# Altium PCB Quad-Serial.PcbDoc
Units mm, origin at the board's own origin, x right, y up, seen from the top; angles counter-clockwise.
Board outline 78 x 100 mm, 2 copper layers (Top Layer, Bottom Layer); 91 components, 67 nets, 340 pads, 202 vias.
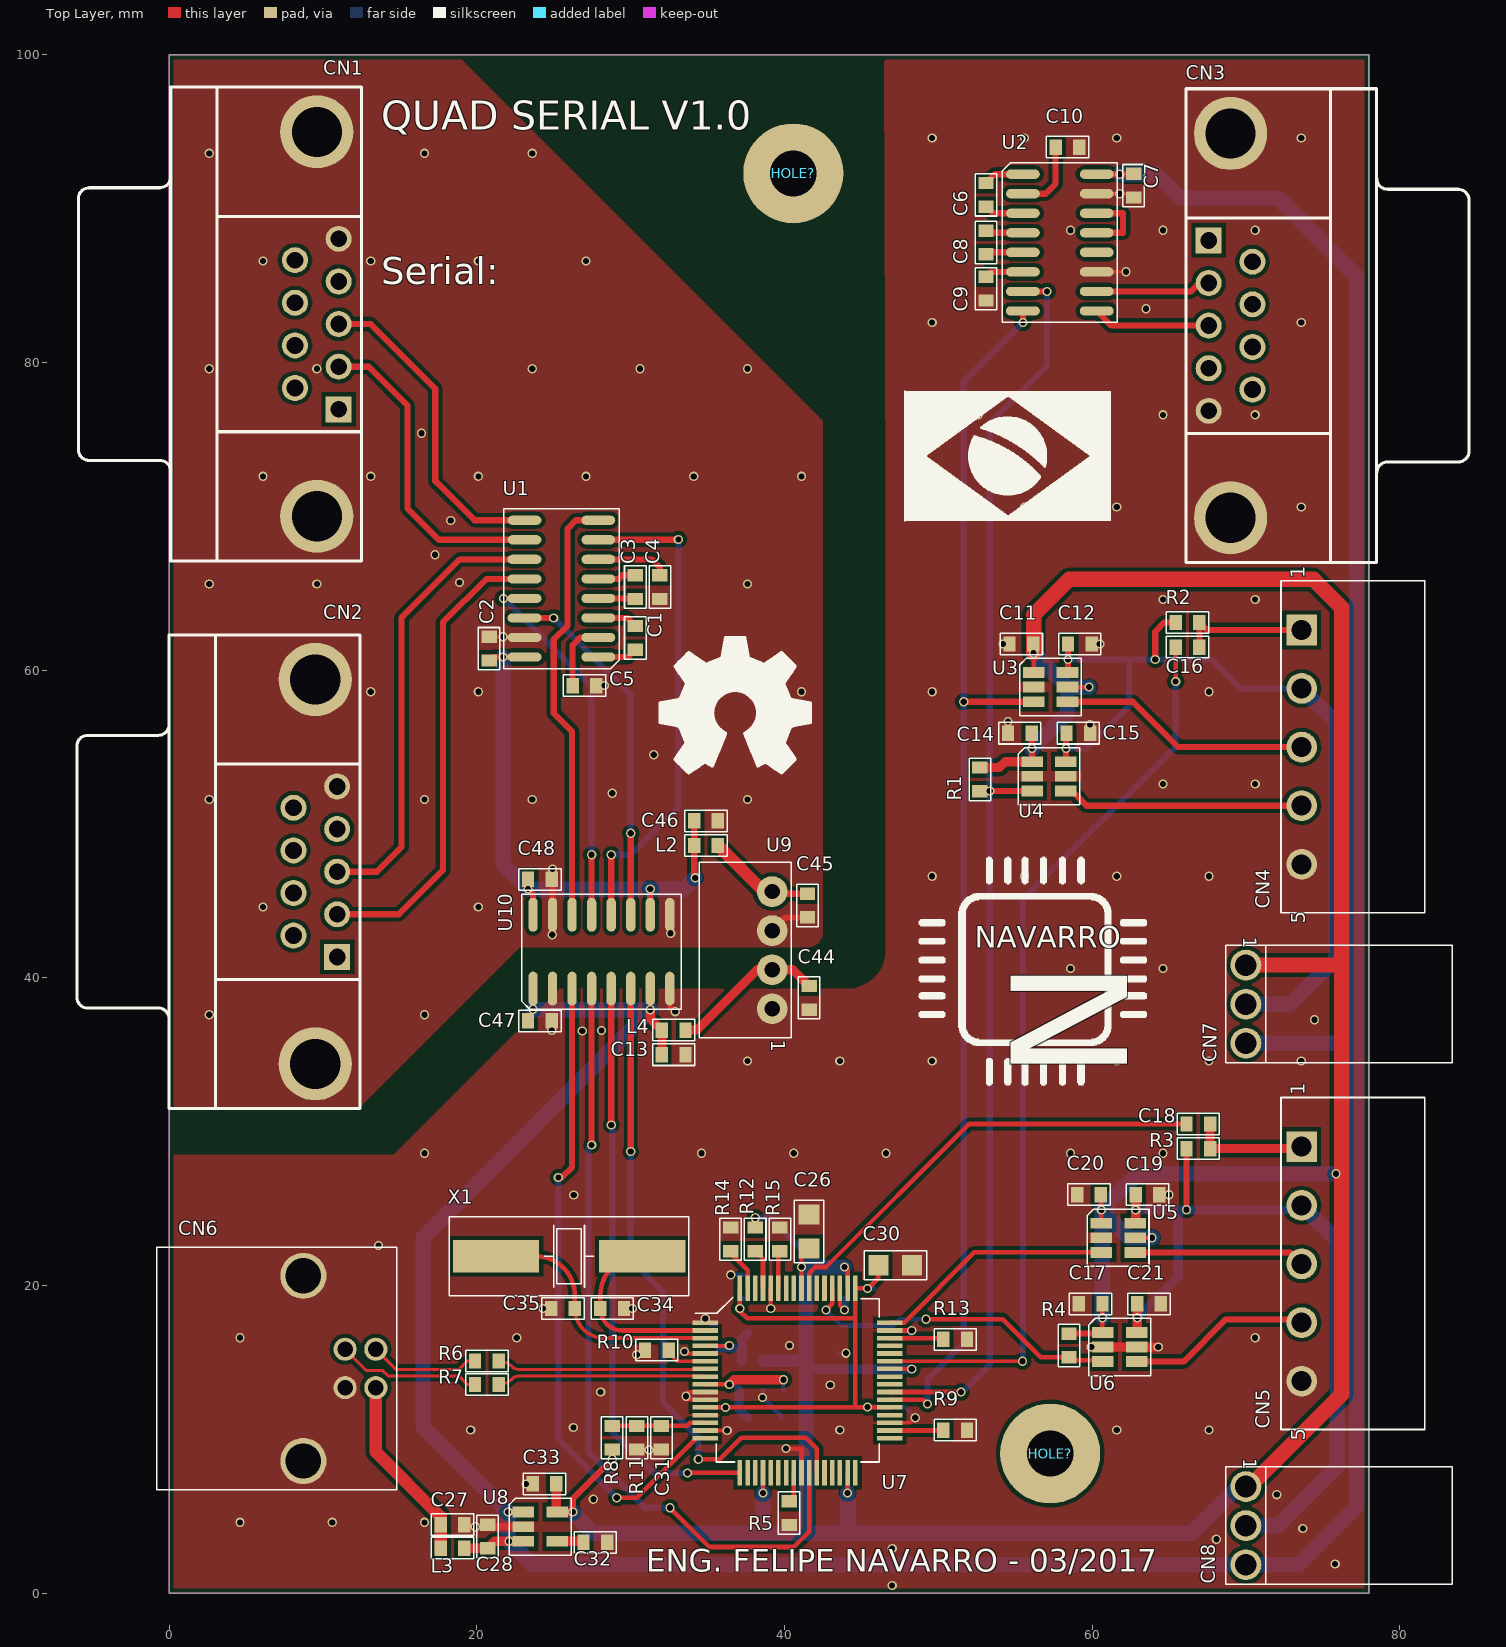
[diagram p0: Top Layer view]
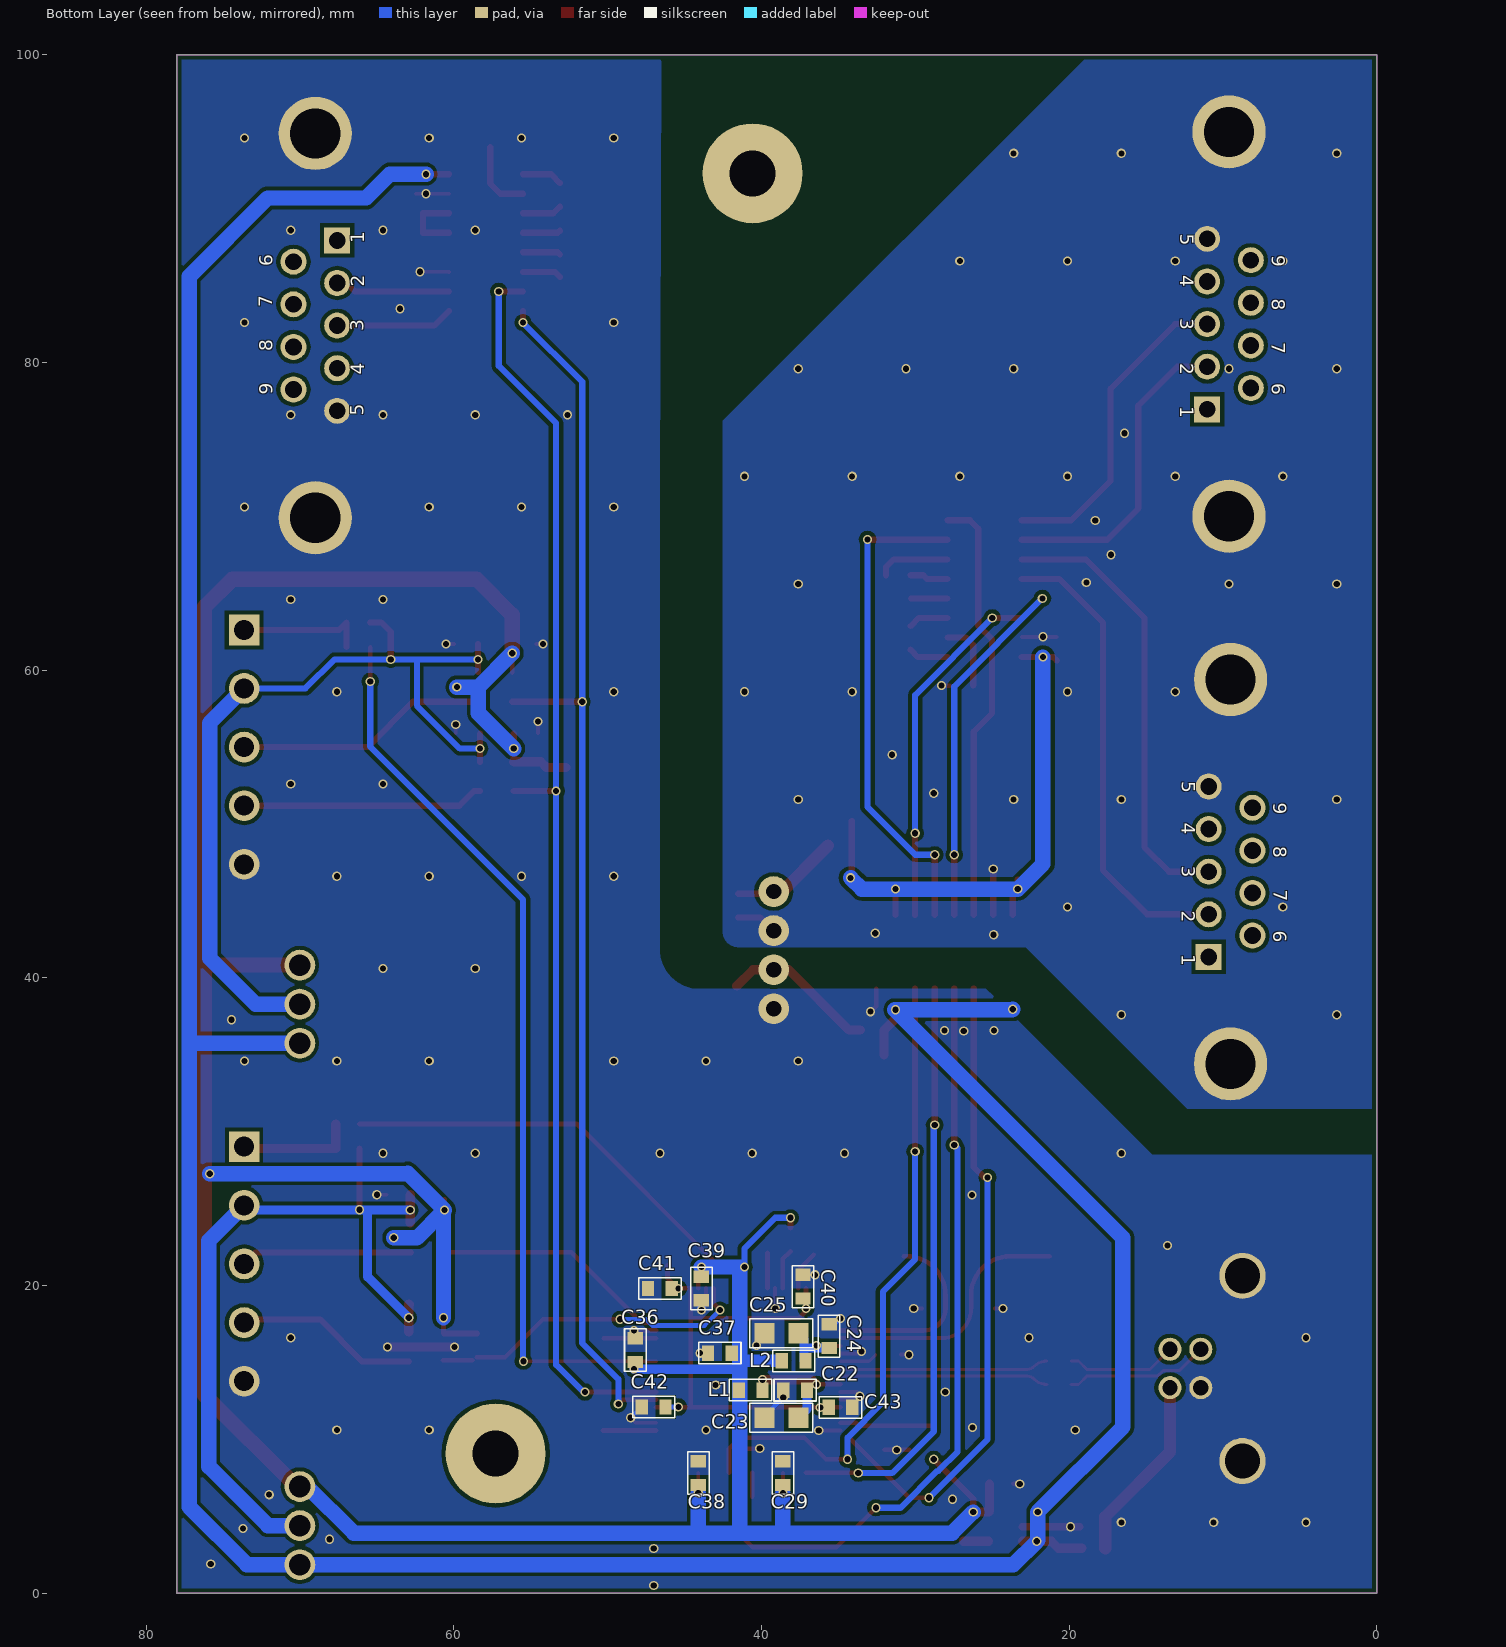
[diagram p1: Bottom Layer view, seen from below]

## Layer stack, top to bottom
Top Solder: solder mask 0.0102, Solder Resist, Dk 3.5
Top Layer: signal copper 0.0356
Dielectric 1: dielectric 0.32, FR-4, Dk 4.8
Bottom Layer: signal copper 0.0356
Bottom Solder: solder mask 0.0102, Solder Resist, Dk 3.5

## Board outline
0,0 78,0 78,100 0,100

## Design rules (kind name [scope] priority, off if disabled: settings)
Clearance [All] p1: gap=0.254
DiffPairsRouting [All] p1: maxlimit=0.254 minlimit=0.2 mostfreqgap=0.2 toplayer_minwidth=0.2 toplayer_maxwidth=0.381 toplayer_prefwidth=0.381 bottomlayer_minwidth=0.2 bottomlayer_maxwidth=0.381 bottomlayer_prefwidth=0.381 maxuncoupledlength=12.7
PolygonConnect [All] p1: connectstyle=Direct reliefconductorwidth=0.254 reliefentries=4 polygonreliefangle="90 Angle" airgapwidth=0.254
RoutingVias [All] p1: holewidth=0.711 width=1.27 viastyle="Through Hole" minholewidth=0.711 minwidth=1.27 maxholewidth=0.711 maxwidth=1.27
SolderMaskExpansion [All] p1: expansion=0.102
Width [All] p1: maxlimit=3 minlimit=0.254 preferedwidth=0.254
29 further rules are at their usual default settings.

## Classes and differential pairs
component class Quad-RS232-1.0-Blocos: HOLE?
component class USB: C22 C23 C24 C25 C26 C27 C28 C29 C30 C31 C32 C33 C34 C35 C36 C37 C38 C39 C40 C41 C42 C43 CN6 L1 L2 L3 R5 R6 R7 R8 R9 R10 R11 R12 R13 R14 R15 U7 U8 X1
component class TTL: C11 C12 C14 C15 C16 C17 C18 C19 C20 C21 CN4 CN5 CN7 CN8 CN#1 CN#2 R1 R2 R3 R4 U3 U4 U5 U6
component class RS-232: C1 C2 C3 C4 C5 C6 C7 C8 C9 C10 C13 C44 C45 C46 C47 C48 CN1 CN2 CN3 L2 L4 U1 U2 U9 U10
differential pair DI: +DI_P -DI_N
differential pair D: +D_P -D_N

## Components (designator, comment, footprint, x,y, rotation, side; value= is the part's Value field where it differs from the comment)
C1 "Capacitor Cerâmico" CC0603 30.3,62.1 r270 top
C2 "Capacitor Cerâmico" CC0603 20.8,61.4 r270 top
C3 "Capacitor Cerâmico" CC0603 30.3,65.4 r270 top
C4 "Capacitor Cerâmico" CC0603 31.9,65.4 r90 top
C5 "Capacitor Cerâmico" CC0603 27,59 r180 top
C6 "Capacitor Cerâmico" CC0603 53.1,90.9 r90 top
C7 "Capacitor Cerâmico" CC0603 62.7,91.5 r90 top
C8 "Capacitor Cerâmico" CC0603 53.1,87.8 r90 top
C9 "Capacitor Cerâmico" CC0603 53.1,84.8 r90 top
C10 "Capacitor Cerâmico" CC0603 58.4,94 r180 top
C11 "Capacitor Cerâmico" CC0603 55.4,61.7 r0 top
C12 "Capacitor Cerâmico" CC0603 59.2,61.7 r180 top
C13 "Capacitor Cerâmico" CC0603 32.8,35 r180 top
C14 "Capacitor Cerâmico" CC0603 55.3,55.9 r0 top
C15 "Capacitor Cerâmico" CC0603 59.1,55.9 r180 top
C16 "Capacitor Cerâmico" CC0603 66.2,61.5 r0 top
C17 "Capacitor Cerâmico" CC0603 59.9,18.8 r0 top
C18 "Capacitor Cerâmico" CC0603 66.9,30.5 r0 top
C19 "Capacitor Cerâmico" CC0603 63.6,25.9 r180 top
C20 "Capacitor Cerâmico" CC0603 59.8,25.9 r0 top
C21 "Capacitor Cerâmico" CC0603 63.7,18.8 r180 top
C22 "Capacitor Cerâmico" CC0603 37.806,13.189 r180 bottom
C23 "Capacitor Cerâmico" CC0805 38.7,11.4 r180 bottom
C24 "Capacitor Cerâmico" CC0603 35.6,16.7 r270 bottom
C25 "Capacitor Cerâmico" CC0805 38.7,16.9 r180 bottom
C26 "Capacitor Cerâmico" CC0805 41.6,23.5 r270 top
C27 "Capacitor Cerâmico" CC0603 18.415,4.445 r180 top
C28 "Capacitor Cerâmico" CC0603 20.701,3.683 r270 top
C29 "Capacitor Cerâmico" CC0603 38.6,7.8 r270 bottom
C30 "Capacitor Cerâmico" CC0805 47.204,21.317 r180 top
C31 "Capacitor Cerâmico" CC0603 32,10.1 r90 top
C32 "Capacitor Cerâmico" CC0603 27.7,3.3 r180 top
C33 "Capacitor Cerâmico" CC0603 24.4,7.1 r0 top
C34 "Capacitor Cerâmico" CC0603 28.8,18.5 r180 top
C35 "Capacitor Cerâmico" CC0603 25.6,18.5 r0 top
C36 "Capacitor Cerâmico" CC0603 48.2,15.8 r270 bottom
C37 "Capacitor Cerâmico" CC0603 42.7,15.6 r180 bottom
C38 "Capacitor Cerâmico" CC0603 44.1,7.8 r270 bottom
C39 "Capacitor Cerâmico" CC0603 43.9,19.8 r90 bottom
C40 "Capacitor Cerâmico" CC0603 37.298,19.92 r270 bottom
C41 "Capacitor Cerâmico" CC0603 46.6,19.8 r180 bottom
C42 "Capacitor Cerâmico" CC0603 47,12.1 r180 bottom
C43 "Capacitor Cerâmico" CC0603 34.854,12.074 r0 bottom
C44 "Capacitor Cerâmico" CC0603 41.6,38.7 r90 top
C45 "Capacitor Cerâmico" CC0603 41.5,44.7 r90 top
C46 "Capacitor Cerâmico" CC0603 34.9,50.2 r180 top
C47 "Capacitor Cerâmico" CC0603 24.1,37.2 r180 top
C48 "Capacitor Cerâmico" CC0603 24.1,46.4 r180 top
CN1 "DB-9" "CONN DB9-F/H" 9.6,82.5 r90 top
CN2 "DB-9" "CONN DB9-F/H" 9.5,46.9 r90 top
CN3 "DB-9" "CONN DB9-F/H" 69,82.4 r270 top
CN4 "Block" "CONN BLOCK5 RCPT/H 3.81" 73.625,55 r0 top
CN5 "Block" "CONN BLOCK5 RCPT/H 3.81" 73.625,21.4 r0 top
CN6 "USB B" CONN_USB-B_RCPT-H 6.3,14.605 r270 top
CN7 "Conector KK" "CONN HDR3-POL P.100 - H" 70,38.3 r270 top
CN8 "Conector KK" "CONN HDR3-POL P.100 - H" 70,4.4 r270 top
CN#1 "Conector Externo" N/A 127.909,51.274 r90 top
CN#2 "Conector Externo" N/A 122.428,58.674 r90 top
HOLE? "Furo de Fixação" Furo_M3 57.275,9.075 r0 top
HOLE? "Furo de Fixação" Furo_M3 40.575,92.3 r0 top
L1 "Bead" CC0603 40.7,13.2 r180 bottom
L2 "Bead" CC0603 34.9,48.6 r180 top
L2 "Bead" CC0603 37.9,15.1 r180 bottom
L3 "Bead" CC0603 18.415,2.921 r0 top
L4 "Bead" CC0603 32.8,36.6 r0 top
R1 "Resistor" CC0603 52.7,52.9 r90 top
R2 "Resistor" CC0603 66.2,63.1 r180 top
R3 "Resistor" CC0603 66.9,28.9 r180 top
R4 "Resistor" CC0603 58.5,16.1 r90 top
R5 "Resistor" CC0603 40.3,5.2 r270 top
R6 "Resistor" CC0603 20.656,15.088 r0 top
R7 "Resistor" CC0603 20.656,13.564 r0 top
R8 "Resistor" CC0603 28.8,10.1 r90 top
R9 "Resistor" CC0603 51.1,10.6 r0 top
R10 "Resistor" CC0603 31.7,15.8 r0 top
R11 "Resistor" CC0603 30.4,10.1 r90 top
R12 "Resistor" CC0603 38.1,23 r270 top
R13 "Resistor" CC0603 51.1,16.5 r0 top
R14 "Resistor" CC0603 36.5,23 r270 top
R15 "Resistor" CC0603 39.7,23 r90 top
U1 "MAX3232" SOIC-16N 25.5,65.3 r180 top
U2 "MAX3232" SOIC-16N 57.9,87.8 r0 top
U3 "SN74LVC1T45" SOT-23-6N 57.3,58.9 r0 top
U4 "SN74LVC1T45" SOT-23-6N 57.2,53.1 r0 top
U5 "SN74LVC1T45" SOT-23-6N 61.7,23.1 r0 top
U6 "SN74LVC1T45" SOT-23-6N 61.8,16 r0 top
U7 "FT4232H" TQFP-64N 40.854,13.824 r0 top
U8 "TPS79333DBVR" SOT-23-5N 24.13,4.318 r0 top
U9 "PDS1-S5-S5-S" SIP-4N 39.2,41.8 r270 top
U10 "SI8642BC-B-IS1" SOIC-16N 28.1,41.7 r90 top
X1 "12MHz" HC/49US 26,21.9 r180 top

## Footprints (in the part's own frame and the unit in brackets; to place one, negate y for a bottom-side part, rotate by r counter-clockwise, add the part's x,y. Pads: shape width x height; smd on the part's side, far side on the other; paste and mask are expansions set on the pad)
CC0603 [mm] "Chip Resistor, 2-Leads, Body 1,6x0,8mm, IPC Medium Density"
  rect 0.8x1 smd: 1(-0.77,0) 2(0.77,0)
  silkscreen extent -1.38,-0.7 1.38,0.7, body extent -0.8,-0.42 0.8,0.43, height 0.45
CC0805 [mm] "Chip Resistor, 2-Leads, Body 2,0x1,2mm, IPC Medium Density"
  rect 1.3x1.35 smd: 1(-1.1,0) 2(1.1,0)
  silkscreen extent -2.05,-0.95 2.02,0.95, body extent -1,-0.63 1,0.62, height 0.6
"CONN BLOCK5 RCPT/H 3.81" [mm] "Conector Shrouded Block. Macho, 4 Pin, Horizontal"
  rect 2x2 hole 1.3: 1(0,7.62)
  round 2 hole 1.3: 2(0,3.81) 3(0,0) 4(0,-3.81) 5(0,-7.62)
  silkscreen extent -1.35,-10.76 8,10.82, body extent -1.2,-10.66 17.14,10.68, height 7.95
"CONN DB9-F/H" [mm] "Connector; Male; D Subminiature; 9 Position; Right Angle; Pitch 1.385 mm"
  rect 1.69x1.69 hole 1.09: 1(-5.54,-1.42)
  round 1.69 hole 1.09: 2(-2.77,-1.42) 3(0,-1.42) 4(2.77,-1.42) 5(5.54,-1.42) 6(-4.155,1.42) 7(-1.385,1.42) 8(1.385,1.42) 9(4.155,1.42)
  round 4.76 hole 3.26: 10(-12.495,0) 11(12.495,0)
  silkscreen extent -15.4,-2.9 15.4,15.5, body extent -15.39,-2.9 15.41,15.49, height 12.75
"CONN HDR3-POL P.100 - H" [mm] "Conector KK Macho, Pitch 2.54mm, 3 Polos 90º"
  round 2 hole 1.4: 1(-2.53,0) 2(0.01,0) 3(2.55,0)
  silkscreen extent -3.82,-1.3 3.82,13.4, body extent -3.83,-0.62 3.82,13.4, height 6
CONN_USB-B_RCPT-H [mm] "Conector USB SMD tipo B, Macho"
  round 1.5 hole 1: 1(1.25,7.135) 2(-1.25,7.135) 3(-1.25,5.135) 4(1.25,5.135)
  round 3 hole 2.3: 5(6.02,2.425) 6(-6.02,2.425)
  silkscreen extent -7.87,-7.11 7.87,8.49, body extent -7.45,-7.96 7.35,8.54, height 11
Furo_M3 [mm] "Furo metalizado para parafuso M3"
  round 6.5 hole 3 paste+0: X(0,0)
  body extent -2.8,-2.8 2.8,2.8, height 2.38
HC/49US [mm] "Crystal, 2-Leads, Body 11,5x4,7mm, IPC Low Density"
  rect 5.6x2.1 smd: 1(-4.75,0) 2(4.75,0)
  silkscreen extent -7.77,-2.58 7.78,2.58, body extent -6.15,-2.25 6.15,2.25, height 5.18
N/A [mm]
SIP-4N [mm] "Conversosr DC-DC, SIP, 4 Pin"
  round 2 hole 1: 1(3.81,0) 2(1.27,0) 3(-1.27,0) 4(-3.81,0)
  silkscreen extent -5.71,-4.75 5.71,1.25, body extent -5.85,-4.78 5.85,1.33, height 10.21
SOIC-16N [mm] "SOIC, 16-Leads, Body 9,9x3,9mm (max), Pitch 1,27mm, IPC Medium Density"
  oval 2.2x0.6 smd: 1(-2.4,4.445) 2(-2.4,3.175) 3(-2.4,1.905) 4(-2.4,0.635) 5(-2.4,-0.635) 6(-2.4,-1.905) 7(-2.4,-3.175) 8(-2.4,-4.445) 9(2.4,-4.445) 10(2.4,-3.175) 11(2.4,-1.905) 12(2.4,-0.635) 13(2.4,0.635) 14(2.4,1.905) 15(2.4,3.175) 16(2.4,4.445)
  silkscreen extent -3.74,-5.19 3.74,5.19, body extent -3.04,-5 3.04,5, height 1.65
SOT-23-5N [mm] "SOT23, 5-Leads, Body 3,1x2,7mm (max), Pitch 0,95mm, IPC Medium Density"
  rect 1.4x0.7 smd: 1(-1.1,0.95) 2(-1.1,0) 3(-1.1,-0.95) 4(1.1,-0.95) 5(1.1,0.95)
  silkscreen extent -2.01,-1.86 2,1.86, body extent -1.4,-1.45 1.4,1.45, height 1.09
SOT-23-6N [mm] "SOT23, 6-Leads, Body 3,1x2,7mm (max), Pitch 0,95mm, IPC Medium Density"
  rect 1.4x0.7 smd: 1(-1.1,0.95) 2(-1.1,0) 3(-1.1,-0.95) 4(1.1,-0.95) 5(1.1,0) 6(1.1,0.95)
  silkscreen extent -2.01,-1.86 2,1.86, body extent -1.5,-1.5 1.5,1.5, height 1.4
TQFP-64N [mm] "TQFP, 64-Leads, Body 12,0x12,0mm (max), Pitch 0,50mm, IPC Medium Density"
  rect 1.65x0.3 smd: 1(-6,3.75) 2(-6,3.25) 3(-6,2.75) 4(-6,2.25) 5(-6,1.75) 6(-6,1.25) 7(-6,0.75) 8(-6,0.25) 9(-6,-0.25) 10(-6,-0.75) 11(-6,-1.25) 12(-6,-1.75) 13(-6,-2.25) 14(-6,-2.75) 15(-6,-3.25) 16(-6,-3.75) 33(6,-3.75) 34(6,-3.25) 35(6,-2.75) 36(6,-2.25) 37(6,-1.75) 38(6,-1.25) 39(6,-0.75) 40(6,-0.25) 41(6,0.25) 42(6,0.75) 43(6,1.25) 44(6,1.75) 45(6,2.25) 46(6,2.75) 47(6,3.25) 48(6,3.75)
  rect 0.3x1.65 smd: 17(-3.75,-6) 18(-3.25,-6) 19(-2.75,-6) 20(-2.25,-6) 21(-1.75,-6) 22(-1.25,-6) 23(-0.75,-6) 24(-0.25,-6) 25(0.25,-6) 26(0.75,-6) 27(1.25,-6) 28(1.75,-6) 29(2.25,-6) 30(2.75,-6) 31(3.25,-6) 32(3.75,-6) 49(3.75,6) 50(3.25,6) 51(2.75,6) 52(2.25,6) 53(1.75,6) 54(1.25,6) 55(0.75,6) 56(0.25,6) 57(-0.25,6) 58(-0.75,6) 59(-1.25,6) 60(-1.75,6) 61(-2.25,6) 62(-2.75,6) 63(-3.25,6) 64(-3.75,6)
  silkscreen extent -6.65,-5.3 5.3,5.41, body extent -6,-6 6,6, height 1.2

## Part data
C1 C3 C4 C5 C6 C8 C9 C10: library part "Cap 1uF 50V 0603 X5R", "Capacitor (Semiconductor SIM Model)"
C2 C7 C11 C12 C13 C14 C15 C16 C17 C18 C19 C20 C21 C22 C24 C27 C28 C29 C31 C33 C36 C37 C38 C39 C40 C41 C42 C43 C44 C45 C46 C47 C48: library part "Cap 100nF 50V 0603 X7R", "Capacitor (Semiconductor SIM Model)"
C23 C25 C26 C30: library part "Cap 10uF 25V 0805 X5R", "Capacitor (Semiconductor SIM Model)"
C32: library part "Cap 10nF 50V 0603 X7R 5%", "Capacitor (Semiconductor SIM Model)"
C34 C35: library part "Cap 36pF 50V 0603 NP0", "Capacitor (Semiconductor SIM Model)"
CN1 CN2 CN3: library part "DB-9 Femea", "Receptacle Assembly, 9 Position, Right Angle"
CN4 CN5: library part "SHRD Block 5P RCPT-H P3.81mm", "Conector Shrouded Block"
CN6: library part "USB B RCPT-H", "Conector Jack USB B, Through Hole, Right Angle, Horizontal"
CN7 CN8: library part "KK 3P Macho-H P2.54mm"
CN#1 CN#2: library part "Plug Block 5P 3.81mm", "Conector Plug"
HOLE? HOLE?: library part Parafuso, "Furo para parafuso"
L1 L2 L2 L3 L4: library part "Bd 100R@100MHz 0603 2A"
R1 R4: library part "Res 47K 1% 0603 1/10W"
R2 R3 R5 R8 R9 R11 R12 R13 R14 R15: library part "Res 10K 1% 0603 1/10W"
R6 R7: library part "Res 22R 1% 0603 1/10W"
R10: library part "Res 12K 1% 0603 1/10W"
U1 U2: "3.0V TO 5.5V, Low-Power, up to 1Mbps, True RS-232 Transceiver Using Four 0.1µF External Capacitor"
U3 U4 U5 U6: "SINGLE-BIT DUAL-SUPPLY BUS TRANSCEIVER  WITH CONFIGURABLE VOLTAGE TRANSLATION AND 3-STATE OUTPUTS"
U7: library part FT2232H, "FT2232H DUAL HIGH SPEED USB TO MULTIPURPOSE UART/FIFO IC"
U8: library part TPS79333, "ULTRALOW-NOISE, HIGH PSRR, FAST RF 200mA LOW-DROPOUT LINEAR  REGULATORS I"
U9: library part "Fonte PDS1-S5-S5-S", "Fonte chaveada isolada"
U10: library part SI8642, "LOW-POWER QUAD-CHANNEL DIGITAL ISOLATOR"
X1: library part XTAL, "Crystal Oscillator"

## Via types
v1: diameter 0.6, hole 0.4, Top Layer to Bottom Layer, tented both sides, 201 vias
v2: diameter 0.6/0.6 (per signal layer), hole 0.4, Top Layer to Bottom Layer, tented both sides, 1 vias

## Nets (pads, with @x,y where several pads share a name; then routed paths per layer and width w, separated by ;. In a path a pad name is that pad's centre, name@x,y a point inside that pad or via, vN(x,y) a via of type N, cw(c..) or ccw(c..) an arc to the next point about the centre after c; other vN are vias at no path point)
1V8: C30.2 C40.2 C41.2 C42.2 C43.2 U7.12 U7.37 U7.49 U7.64 | length 34.1
  Top Layer w0.254: 44.537,12.074 44.604,12.141
  Top Layer w0.3: U7.12 44.537,12.074 U7.37 ; U7.64 37.104,18.336 37.571,17.869 44.585,17.869 44.604,17.888 ; 44.604,12.141 44.604,17.888 ; C30.2 46.104,20.471 45.457,19.824 U7.49 44.604,17.888
  Bottom Layer w0.3: C43.2 v1(36.174,12.074) ; v1(37.1,18.5) 37.1,18.952 C40.2 ; v1(45.4,12.1) C42.2 ; v1(45.4,19.8) C41.2
3V3: C11.2 C14.2 C17.2 C20.2 C26.2 C29.2 C33.2 C36.2 C37.2 C38.2 C39.2 CN7.1 CN8.1 L1.1 L2.1@38.67,15.1 R1.2 R4.2 R8.1 R12.1 U3.1 U3.5 U4.1 U5.1 U5.5 U6.1 U7.20 U7.31 U7.42 U7.50 U7.56 U8.5 | length 241.7
  Top Layer w0.254: v1(38.604,6.504) U7.20 ; U7.56 v1(41.104,21.196) C26.2@41.104,22.096 ; v1(44.104,6.504) U7.31 ; U7.42 v1(48.274,14.574)
  Top Layer w0.3: v1(43.9,21.2) 44.104,20.996 U7.50 ; U3.1 v1(56.2,61.1) ; U3.5 v1(59.8,58.9) ; U5.1 v1(60.6,24.9) C20.2@60.6,25.6 ; U6.1@60.67,16.98 v1(60.67,17.9) C17.2 ; U5.5 v1(63.9,23.1)
  Top Layer w0.4: v1(26.232,5.268) 26.232,6.132 v1(28.8,8.7) ; R12.1 v1(38.1,24.4) ; U4.1 v1(56.1,54.9) C14.2@56.1,55.87 ; R4.2 U6.1@60.62,16.87
  Top Layer w0.6: U8.5@25.17,5.328 C33.2 ; U8.5 v1(26.232,5.268) ; R1.2 53.97,53.67 54.35,54.05 U4.1
  Top Layer w1: v1(56.2,61.1) 56.2,63.6 58.5,65.9 74.4,65.9 76.225,64.075 76.225,40.83 ; CN8.1 70.23,6.93 76.225,12.925 76.225,40.83 ; CN7.1 76.225,40.83
  Bottom Layer w0.4: v1(38.1,24.4) 39.1,24.4 41.104,22.396 v1(41.104,21.196)
  Bottom Layer w0.6: 41.646,14.546 48.274,14.546 v1(48.274,14.574)
  Bottom Layer w0.8: L2.1@38.67,15.1 40.9,15.1
  Bottom Layer w1: v1(26.232,5.268) 27.6,3.9 41.4,3.9 ; 38.604,4.004 v1(38.604,6.504) ; v1@41.4,21.196 41.4,3.9 ; v1@41.4,21.2 v1(43.9,21.2) ; 44.104,3.904 v1(44.104,6.504) ; v1(56.1,54.9) 58.4,57.2 58.4,58.9 ; v1(56.2,61.1) 58.4,58.9 ; v1(59.8,58.9) 58.4,58.9 ; v1(60.67,17.9) v1@60.67,24.83 ; v1(63.9,23.1) 62.4,23.1 v1@60.67,24.83 ; CN8.1 69.53,6.93 66.5,3.9 41.4,3.9 ; v1(75.859,27.266) 63.034,27.266 63,27.3 v1(60.6,24.9) v1@60.67,24.83
5V: C7.2 C13.2 C28.2 C47.2 CN7.3 CN8.3 L3.2 L4.1 U2.16 U8.1 U8.3 U10.1 U10.7 | length 222.9
  Top Layer w0.4: U2.16 v1(61.8,92.245) C7.2@62.675,92.245
  Top Layer w0.6: L3.2@19.169,2.921 19.177,2.913 20.693,2.913 21.148,3.368 U8.3 ; v1(31.275,37.925) 31.275,37.355 L4.1 C13.2
  Bottom Layer w1: v1(23.655,37.955) 23.685,37.925 v1@31.325,37.925 ; v1@31.3,37.9 16.5,23.1 16.5,10.805 v1(22.037,5.268) 22.037,3.429 v1(22.098,3.368) 23.62,1.846 69.996,1.846 CN8.3 73.45,1.85 77.196,5.596 77.196,85.604 72.1,90.7 65.7,90.7 64.155,92.245 v1(61.8,92.245) ; CN7.3 77.175,35.75
5V_ISO: C2.2 C46.2 C48.2 L2.2@34.13,48.6 U1.16 U10.10 U10.16 | length 37
  Top Layer w0.4: C2.2 21.025,60.855 v1(21.7,60.855) U1.16 ; C48.2 v1(23.33,45.77) 23.655,45.445 U10.16 ; U10.10 v1(31.275,45.775) ; v1@34.13,46.6 C46.2
  Bottom Layer w1: v1(21.7,60.855) 21.7,47.4 v1(23.33,45.77) 33.47,45.77 v1(34.2,46.5)
232-RX1: CN1.2 U1.10 | length 20.7
  Top Layer w0.4: CN1.2 12.97,79.73 15.5,77.2 15.5,70.5 17.525,68.475 U1.10
232-RX2: CN2.2 U1.12 | length 30.6
  Top Layer w0.4: CN2.2 14.93,44.13 17.8,47 17.8,63.1 20.635,65.935 U1.12
232-RX3: CN3.2 U2.10 | length 6.9
  Top Layer w0.4: U2.10 66.435,84.625 CN3.2@66.98,85.17
232-TX1: CN1.3 U1.9 | length 20.9
  Top Layer w0.4: CN1.3 13.1,82.5 17.3,78.3 17.3,72.3 19.855,69.745 U1.9
232-TX2: CN2.3 U1.11 | length 29.3
  Top Layer w0.4: CN2.3 13.5,46.9 15.1,48.5 15.1,63.4 18.905,67.205 U1.11
232-TX3: CN3.3 U2.9 | length 7.1
  Top Layer w0.4: U2.9 61.255,82.4 CN3.3@66.98,82.4
D_N: R6.2 U7.7 | length 13.6
  Top Layer w0.2: R6.2 cw(c21.426,13.881) 22.28,14.734 ccw(c22.783,15.238) 22.783,14.526 U7.7@34.854,14.526
D_P: R7.2 U7.8 | length 13.6
  Top Layer w0.2: R7.2 ccw(c21.426,14.771) 22.28,13.918 cw(c22.783,13.414) 22.783,14.126 U7.8@34.854,14.126
DI_N: CN6.2 R6.1 | length 7.2
  Top Layer w0.2: CN6.2 14.764,14.526 18.824,14.526 19.386,15.088 R6.1
DI_P: CN6.3 R7.1 | length 9.4
  Top Layer w0.2: CN6.3 12.831,14.459 13.892,14.459 14.225,14.126 18.824,14.126 19.386,13.564 R7.1
GND: C7.1 C9.1 C10.1 C11.1 C12.1 C13.1 C14.1 C15.1 C17.1 C19.1 C20.1 C21.1 C22.1 C23.1 C24.1 C25.1 C26.1 C27.1 C28.1 C29.1 C30.1 C31.1 C32.1 C33.1 C34.1 C35.1 C36.1 C37.1 C38.1 C39.1 C40.1 C41.1 C42.1 C43.1 C44.1 C47.1 CN3.5 CN3.10 CN3.11 CN4.5 CN5.5 CN6.4 CN6.5 CN6.6 R5.2 R9.2 R10.1 R11.1 R13.2 R14.1 R15.2 U2.11 U2.15 U3.2 U4.2 U4.5 U5.2 U6.2 U6.5 U7.1 U7.5 U7.10 U7.11 U7.13 U7.15 U7.25 U7.35 U7.47 U7.51 U7.60 U8.2 U9.1 U10.2 U10.8 | length 41
  Top Layer w0.254: v1(24.3,18.5) C35.1 ; C34.1 v1(30.1,18.5) ; v1(30.4,15.5) R10.1@30.93,15.5 ; v1@33.626,15.574 U7.5 ; U7.15 v1(36.274,10.574) ; U7.11 33.726,12.574 33.6,12.7 33.6,12.9 33.774,13.074 U7.10 ; v1(39.104,18.496) U7.60 ; U7.51 43.604,18.696 v1(43.9,18.4) ; U7.35 48.174,11.074 v1(48.5,11.4) ; v1(54.2,61.7) C11.1 ; C14.1 v1(54.53,56.67) ; C15.1 v1(59.87,56.47) ; C12.1 v1(60.5,61.7) ; U2.11 60.305,85.9 v1(62.2,85.9) ; U2.15 C7.1@62.455,90.975 ; C19.1 v1(65,25.9)
  Top Layer w0.3: v1(23.2,7.1) C33.1 ; R11.1 C31.1 ; U10.8 32.545,38.155 v1(32.9,37.8) ; v1(40.104,9.396) 41.104,9.396 U7.25 ; U7.47 v1(48.274,17.074)
  Top Layer w0.5: C27.1@19.312,4.318 U8.2
  Top Layer w0.6: v1(59.946,16) U6.2 U6.5 v1(64.3,16)
  Bottom Layer w0.254: v1(34.854,17.846) 35.23,17.47 C24.1 ; C42.1 47.8,12.1 v1(48.5,11.4)
  Bottom Layer w0.3: v1(36.51,20.69) C40.1 ; C22.1 v1(38.576,12.724) 39.8,11.5 C23.1 ; C37.1 v1(44,15.6) ; C36.1 v1@48.2,17
  Bottom Layer w0.6: v1(43.9,18.4) C39.1
  other v1: 47,0.5 75.8,1.9 68.075,3.5 73.7,4.2 19.9,4.318 4.6,4.6 10.6,4.6 16.6,4.6 27.575,6.1 72,6.4 31.2,9.3 19.6,10.6 43.6,10.6 61.6,10.6 67.6,10.6 26.275,10.775 33.6,12.8 28.05,13.075 42.975,13.525 33.5,15.7 40.325,16.1 4.6,16.6 22.6,16.6 70.6,16.6 13.6,22.6 26.3,25.875 16.6,28.6 34.6,28.6 40.6,28.6 46.6,28.6 58.6,28.6 64.6,28.6 37.6,34.6 43.6,34.6 49.6,34.6 61.6,34.6 67.6,34.6 73.6,34.6 26.85,36.55 24.875,36.575 28.1,36.575 74.45,37.275 58.6,40.6 64.6,40.6 49.6,46.6 55.6,46.6 61.6,46.6 67.6,46.6 64.6,52.6 70.6,52.6 49.6,58.6 67.6,58.6 64.6,64.6 70.6,64.6 49.6,70.6 55.6,70.6 61.6,70.6 73.6,70.6 52.6,76.6 58.6,76.6 64.6,76.6 70.6,76.6 49.6,82.6 73.6,82.6 63.5,83.5 58.6,88.6 64.6,88.6 70.6,88.6 61.8,90.975 49.6,94.6 55.6,94.6 61.6,94.6 73.6,94.6
  other v2: 47,2.9
GND_ISO: C2.1 C4.1 C5.1 C45.1 C46.1 C48.1 CN1.5 CN1.10 CN1.11 CN2.5 CN2.10 CN2.11 U1.15 U9.3 U10.9 U10.15 | length 8.4
  Top Layer w0.254: C2.1 U1.15@23.055,62.17
  Top Layer w0.3: C5.1 v1(28.3,59)
  Top Layer w0.4: U10.15 v1(24.925,47.075) ; U9.3 40.06,43.93 C45.1
  other v1: 2.6,37.6 16.6,37.6 24.9,42.8 32.6,42.9 6.1,44.6 20.1,44.6 2.6,51.6 16.6,51.6 23.6,51.6 37.6,51.6 28.8,52 31.5,54.5 13.1,58.6 20.1,58.6 34.1,58.6 41.1,58.6 21.7,62.17 2.6,65.6 9.6,65.6 37.6,65.6 18.875,65.7 17.275,67.5 18.3,69.725 6.1,72.6 13.1,72.6 20.1,72.6 27.1,72.6 34.1,72.6 41.1,72.6 16.4,75.4 2.6,79.6 9.6,79.6 23.6,79.6 30.6,79.6 37.6,79.6 6.1,86.6 13.1,86.6 20.1,86.6 27.1,86.6 2.6,93.6 16.6,93.6 23.6,93.6
NetC1_1: C1.1 U1.3 | length 2.6
  Top Layer w0.4: U1.3 29.775,63.395 C1.1
NetC1_2: C1.2 U1.1 | length 2.6
  Top Layer w0.4: U1.1 29.825,60.855 C1.2
NetC3_1: C3.1 U1.5 | length 2.5
  Top Layer w0.4: U1.5 29.235,65.935 29.47,66.17 C3.1
NetC3_2: C3.2 U1.4 | length 2.4
  Top Layer w0.4: U1.4 C3.2@30.265,64.665
NetC4_2: C4.2 U1.6 | length 4.7
  Top Layer w0.4: U1.6 31.395,67.205 31.9,66.7 C4.2
NetC5_2: C5.2 U1.2 | length 4.5
  Top Layer w0.4: C5.2 26.23,61.63 26.725,62.125 U1.2
NetC6_1: C6.1 U2.3 | length 2.6
  Top Layer w0.4: C6.1 53.525,89.705 U2.3
NetC6_2: C6.2 U2.1 | length 2.6
  Top Layer w0.4: C6.2 53.675,92.245 U2.1
NetC8_1: C8.1 U2.5 | length 2.5
  Top Layer w0.4: C8.1 53.235,87.165 U2.5
NetC8_2: C8.2 U2.4 | length 2.5
  Top Layer w0.4: C8.2 53.235,88.435 U2.4
NetC9_2: C9.2 U2.6 | length 2.5
  Top Layer w0.4: C9.2 53.425,85.895 U2.6
NetC10_2: C10.2 U2.2 | length 4.8
  Top Layer w0.4: U2.2 56.975,90.975 57.63,91.63 C10.2
NetC27_2: C27.2 CN6.1 L3.1 | length 12.2
  Top Layer w0.8: CN6.1 13.435,9.171 17.645,4.961 L3.1
NetC31_2: C31.2 R8.2 R11.2 U7.14 | length 6.1
  Top Layer w0.3: R8.2 R11.2 C31.2 33.67,10.87 33.874,11.074 U7.14
NetC32_2: C32.2 U8.4 | length 1.6
  Top Layer w0.6: U8.4 C32.2@26.862,3.368
NetC34_2: C34.2 U7.2 X1.1 | length 12.7
  Top Layer w0.3: X1.1 30.57,21.9 ccw(c30.57,19.36) 28.03,19.36 C34.2 ccw(c29.456,18.5) 29.456,17.074 U7.2
NetC35_2: C35.2 U7.3 X1.2 | length 17
  Top Layer w0.254: C35.2 ccw(c28.296,18.5) 28.296,16.574 U7.3
  Top Layer w0.3: X1.2 23.83,21.9 cw(c23.83,19.36) 26.37,19.36 C35.2
NetC44_2: C44.2 L4.2 U9.2 | length 10.1
  Top Layer w0.6: L4.2 34.3,36.6 38.23,40.53 U9.2 40.54,40.53 C44.2
NetC45_2: C45.2 L2.1@35.67,48.6 U9.4 | length 7.1
  Top Layer w0.4: U9.4@39.34,45.47 C45.2
  Top Layer w0.8: L2.1@35.67,48.6 38.8,45.47 U9.4@39.34,45.47
NetR5_1: R5.1 U7.24 | length 1.5
  Top Layer w0.3: R5.1@40.604,6.274 U7.24
NetR9_1: R9.1 U7.34 | length 3.4
  Top Layer w0.3: U7.34 R9.1@50.304,10.574
NetR10_2: R10.2 U7.6 | length 2.5
  Top Layer w0.2: R10.2@32.57,15.5 32.996,15.074 U7.6
NetR12_2: R12.2 U7.61 | length 2.6
  Top Layer w0.3: R12.2 38.604,21.726 U7.61
NetR13_1: R13.1 U7.46 | length 3.4
  Top Layer w0.3: U7.46 R13.1@50.256,16.574
NetR14_2: R14.2 U7.63 | length 2.6
  Top Layer w0.3: R14.2@36.6,22 37.604,20.996 U7.63
NetR15_1: R15.1 U7.59 | length 2.3
  Top Layer w0.3: U7.59 R15.1@39.604,22.134
NetU2_13: U2.13 U2.14 | length 4.7
  Top Layer w0.4: U2.13 62,88.435 62,89.705 U2.14
RESET3: C16.2 CN4.1 R2.1 | length 8.5
  Top Layer w0.4: C16.2 R2.1 67.45,62.62 CN4.1
RESET4: C18.2 CN5.1 R3.1 | length 7.6
  Top Layer w0.6: C18.2 R3.1 CN5.1@73.625,28.9
RST3: C16.1 U7.43 | length 59.2
  Top Layer w0.254: U7.43 v1(55.474,15.074)
  Top Layer w0.3: v1(65.43,59.27) C16.1
  Bottom Layer w0.4: v1@55.5,15 55.5,45.1 65.43,55.03 v1(65.43,59.27)
RST4: C18.1 U7.55 | length 29.5
  Top Layer w0.3: U7.55 41.604,20.804 42,21.2 42.7,21.2 52,30.5 C18.1
RX1: U7.17 U10.5 | length 38.2
  Top Layer w0.3: v1@33.7,7.824 U7.17
  Top Layer w0.4: v1(28.735,30.435) U10.5
  Bottom Layer w0.4: v1@28.8,30.4 28.8,10.5 31.5,7.8 v1(33.7,7.8)
RX1_ISO: U1.7 U10.12 | length 32.2
  Top Layer w0.4: U1.7 v1@33.075,68.475 ; U10.12 v1(28.735,48) v1@28.735,48.065
  Bottom Layer w0.4: v1(28.735,48) 30,48 33.1,51.1 v1(33.1,68.5)
RX2: U7.27 U10.6 | length 42.6
  Top Layer w0.3: v1(34.4,8.7) 35.8,8.7 37.2,10.1 41.4,10.1 42.104,9.396 U7.27
  Top Layer w0.4: v1(30.005,28.705) U10.6
  Bottom Layer w0.4: v1(30.005,28.705) 30.005,21.695 32.1,19.6 32.1,12.4 34.4,10.1 v1(34.4,8.7)
RX2_ISO: U1.14 U10.11 | length 23.3
  Top Layer w0.4: U1.14 v1(24.995,63.395) ; U10.11 v1(30.005,49.395)
  Bottom Layer w0.4: v1(24.995,63.395) 30.005,58.385 v1(30.005,49.395)
RX3: R1.1 U2.7 U4.3 U7.39 | length 82.9
  Top Layer w0.3: U7.39 v1(51.474,13.074)
  Top Layer w0.4: v1(53.35,52.15) U4.3 ; U2.7 v1(57.075,84.625)
  Bottom Layer w0.4: v1@51.5,13 53.35,14.85 v1(53.35,52.15) 53.35,76.05 57.075,79.775 v1(57.075,84.625)
RX3_O: CN4.4 U4.4 | length 15.7
  Top Layer w0.4: U4.4 58.675,52.15 59.635,51.19 CN4.4
RX4: R4.1 U6.3 U7.52 | length 20.9
  Top Layer w0.3: v1(42.7,18.4) 43.104,18.804 U7.52 ; v1(49.2,17.8) 54.2,17.8 56.67,15.33 R4.1 ; R4.1@58.78,15.15 U6.3@60.7,15.15
  Bottom Layer w0.3: v1(42.7,18.4) 43.7,17.4 47.1,17.4 47.5,17.8 v1(49.2,17.8)
RX4_O: CN5.4 U6.4 | length 11.9
  Top Layer w0.4: U6.4 65.95,15.05 68.69,17.79 CN5.4@73.625,17.79
TX1: U7.16 U10.3 | length 41.8
  Top Layer w0.3: v1(29.1,6.2) 30.4,6.2 U7.16@34.2,10
  Top Layer w0.4: v1(25.3,27.025) 25.52,27.025 26.195,27.7 U10.3
  Bottom Layer w0.4: v1(25.3,27.025) 25.3,10 v1(29.1,6.2)
TX1_ISO: U1.8 U10.14 | length 28.2
  Top Layer w0.4: U10.14 26.195,56.005 25,57.2 25,62 25.9,62.9 25.9,69.2 26.445,69.745 U1.8
TX2: U7.26 U10.4 | length 51.4
  Top Layer w0.3: v1(32.55,5.55) 35.1,3 40.6,3 41.604,4.004 U7.26
  Top Layer w0.4: v1(27.465,29.135) U10.4
  Bottom Layer w0.4: v1(27.465,29.135) 27.25,28.92 27.25,9.184 28.488,7.946 28.554,7.946 30.95,5.55 v1(32.55,5.55)
TX2_ISO: U1.13 U10.13 | length 22.9
  Top Layer w0.4: U10.13 v1(27.465,48)
  Bottom Layer w0.4: v1(21.735,64.665) 27.465,58.935 v1(27.465,48)
TX3: U2.8 U3.3 U7.38 | length 80.7
  Top Layer w0.3: U7.38 49.026,12.574 v1(49.3,12.3)
  Top Layer w0.4: v1(51.65,57.95) U3.3 ; v1(55.5,82.6) U2.8
  Bottom Layer w0.4: v1(49.3,12.3) 49.3,13.9 51.65,16.25 v1(51.65,57.95) 51.65,78.75 v1(55.5,82.6)
TX3_O: CN4.3 U3.4 | length 16.4
  Top Layer w0.4: U3.4 62.65,57.95 65.6,55 CN4.3
TX4: U5.3 U7.48 | length 15.6
  Top Layer w0.3: U7.48 47.774,17.574 52.35,22.15 U5.3
TX4_O: CN5.3 U5.4 | length 11.1
  Top Layer w0.4: U5.4 72.875,22.15 CN5.3
V_IN3: C12.2 C15.2 CN4.2 CN7.2 R2.2 U3.6 U4.6 | length 56.8
  Top Layer w0.4: U4.6 v1(58.3,54.9) C15.2@58.3,55.87 ; U3.6@58.43,59.88 v1(58.43,60.7) C12.2 ; v1(64.1,60.7) 64.1,62.5 64.7,63.1 R2.2
  Bottom Layer w0.4: v1(58.3,54.9) 59.6,54.9 62.4,57.7 62.4,60.7 ; v1(58.43,60.7) 62.4,60.7 ; CN4.2 69.64,58.81 67.75,60.7 62.4,60.7
  Bottom Layer w1: CN7.2 72.89,38.29 75.875,41.275 75.875,56.56 CN4.2
V_IN4: C19.2 C21.2 CN5.2 CN8.2 R3.2 U5.6 U6.6 | length 51.7
  Top Layer w0.4: v1(66.13,24.92) R3.2
  Top Layer w0.6: U5.6@62.83,24.08 v1(62.83,24.9) C19.2 ; C21.2@62.9,18.77 C21.2 v1(62.93,17.9) U6.6@62.93,16.98
  Bottom Layer w0.6: v1(62.83,24.9) 65.6,24.9 ; v1(62.93,17.9) 65.6,20.57 65.6,24.9 ; CN5.2@73.315,24.9 65.6,24.9
  Bottom Layer w1: CN8.2 72.09,4.39 75.925,8.225 75.925,22.91 CN5.2
VPHY: C24.2 C25.2 L2.2@37.13,15.1 U7.4 | length 5.4
  Top Layer w0.254: U7.4 36.349,16.074 ccw(c36.349,16.17) v1(36.417,16.102)
  Bottom Layer w0.254: v1(36.417,16.102) 36.917,16.102
  Bottom Layer w0.6: C24.2@35.8,15.93 37.2,15.93 ; L2.2@37.23,15.1 37.23,16.53 C25.2
VPLL: C22.2 C23.2 L1.2 U7.9 | length 8.6
  Top Layer w0.3: U7.9 v1@36.417,13.574
  Top Layer w0.6: v1(36.417,13.57) 36.717,13.87 v1(39.93,13.87)
  Bottom Layer w0.254: v1@36.282,13.57 ccw(c36.569,13.857) 36.569,13.451 C22.2@36.917,13.451
  Bottom Layer w0.3: L1.2 v1(39.93,13.87)
  Bottom Layer w0.6: C22.2 37.036,11.964 C23.2
pads on no net: CN1.1 CN1.4 CN1.6 CN1.7 CN1.8 CN1.9 CN2.1 CN2.4 CN2.6 CN2.7 CN2.8 CN2.9 CN3.1 CN3.4 CN3.6 CN3.7 CN3.8 CN3.9 HOLE?.X U2.12 U7.18 U7.19 U7.21 U7.22 U7.23 U7.28 U7.29 U7.30 U7.32 U7.33 U7.36 U7.40 U7.41 U7.44 U7.45 U7.53 U7.54 U7.57 U7.58 U7.62

## Polygon pours and split planes (outlines as drawn)
GND on Bottom Layer "Top Layer-No Net" (solid, remove dead copper, pour order 12): 46.5,100 78,100 78,0.2 78,0 0,0 0,22.4 0,28.5 14.6,28.5 20.5,34.4 25.4,39.3 42.2,39.3 44.06,39.3 ccw(c44.06,41.84) 46.6,41.84 46.6,71.6
GND_ISO on Bottom Layer "Top Layer-No Net" (solid, remove dead copper, pour order 4): 0,100 0,31.7 0.2,31.5 12.3,31.5 22.8,42 28.4,42 41.5,42 ccw(c41.5,43) 42.5,43 42.5,76.2 18.7,100
GND on Top Layer "Top Layer-No Net" (solid, remove dead copper, pour order 10): 46.5,100 78,100 78,0.2 78,0 0,0 0,22.4 0,28.5 14.6,28.5 20.5,34.4 25.4,39.3 42.2,39.3 44.06,39.3 ccw(c44.06,41.84) 46.6,41.84 46.6,71.6
GND_ISO on Top Layer "Top Layer-No Net" (solid, remove dead copper, pour order 6): 0,100 0,31.7 0.2,31.5 12.3,31.5 22.8,42 28.4,42 41.5,42 ccw(c41.5,43) 42.5,43 42.5,76.2 18.7,100

## Keep-outs
Keep-Out Layer:
  the board outline again, w0.1

## Silkscreen, mask and mechanical layers (free items; w line width, h text height)
Top Overlay:
  drawing of 2787 lines, arcs and shapes, not listed
  text "QUAD SERIAL V1.0" at 13.8,94.525 h3.2
  text "Serial:" at 13.8,84.5 h3
  text "NAVARRO" at 52.375,41.5 h2.39
  text "N" at 52.248,41.13 h12.94 r270
  text "ENG. FELIPE NAVARRO - 03/2017" at 31,0.9 h2.5

## Text inside footprints (layer, text, board x,y; h text height)
CN1: Bottom Overlay "6" at 7.116,78.656 h1.5 r90; Bottom Overlay "1" at 13.067,77.148 h1.5 r90; Bottom Overlay "2" at 13.067,79.958 h1.5 r90; Bottom Overlay "3" at 13.05,82.872 h1.5 r90; Bottom Overlay "4" at 13.067,85.682 h1.5 r90; Bottom Overlay "5" at 13.05,88.368 h1.5 r90; Bottom Overlay "9" at 7.116,86.984 h1.5 r90; Bottom Overlay "8" at 7.116,84.153 h1.5 r90; Bottom Overlay "7" at 7.099,81.322 h1.5 r90
CN2: Bottom Overlay "7" at 6.999,45.722 h1.5 r90; Bottom Overlay "8" at 7.016,48.553 h1.5 r90; Bottom Overlay "9" at 7.016,51.384 h1.5 r90; Bottom Overlay "5" at 12.95,52.768 h1.5 r90; Bottom Overlay "4" at 12.967,50.082 h1.5 r90; Bottom Overlay "3" at 12.95,47.272 h1.5 r90; Bottom Overlay "2" at 12.967,44.358 h1.5 r90; Bottom Overlay "1" at 12.967,41.548 h1.5 r90; Bottom Overlay "6" at 7.016,43.056 h1.5 r90
CN3: Bottom Overlay "6" at 71.484,86.244 h1.5 r270; Bottom Overlay "1" at 65.533,87.752 h1.5 r270; Bottom Overlay "2" at 65.533,84.942 h1.5 r270; Bottom Overlay "3" at 65.55,82.028 h1.5 r270; Bottom Overlay "4" at 65.533,79.218 h1.5 r270; Bottom Overlay "5" at 65.55,76.532 h1.5 r270; Bottom Overlay "9" at 71.484,77.916 h1.5 r270; Bottom Overlay "8" at 71.484,80.747 h1.5 r270; Bottom Overlay "7" at 71.501,83.578 h1.5 r270
CN4: Top Overlay "1" at 74.145,65.974 h1.6 r90; Top Overlay "5" at 74.196,43.503 h1.6 r90
CN5: Top Overlay "5" at 74.196,9.903 h1.6 r90; Top Overlay "1" at 74.145,32.374 h1.6 r90
CN7: Top Overlay "1" at 69.542,42.678 h1.5 r270
CN8: Top Overlay "1" at 69.542,8.778 h1.5 r270
U9: Top Overlay "1" at 38.825,35.958 h1.6 r270